# Altium PCB PCB1.PcbDoc (part 1 of 3)
Units mm, origin at the board's own origin, x right, y up, seen from the top; angles counter-clockwise.
Board outline 150.95 x 92.76 mm, 4 copper layers (Top Layer, GND, VCC, Bottom Layer); 250 components, 258 nets, 1099 pads, 538 vias.
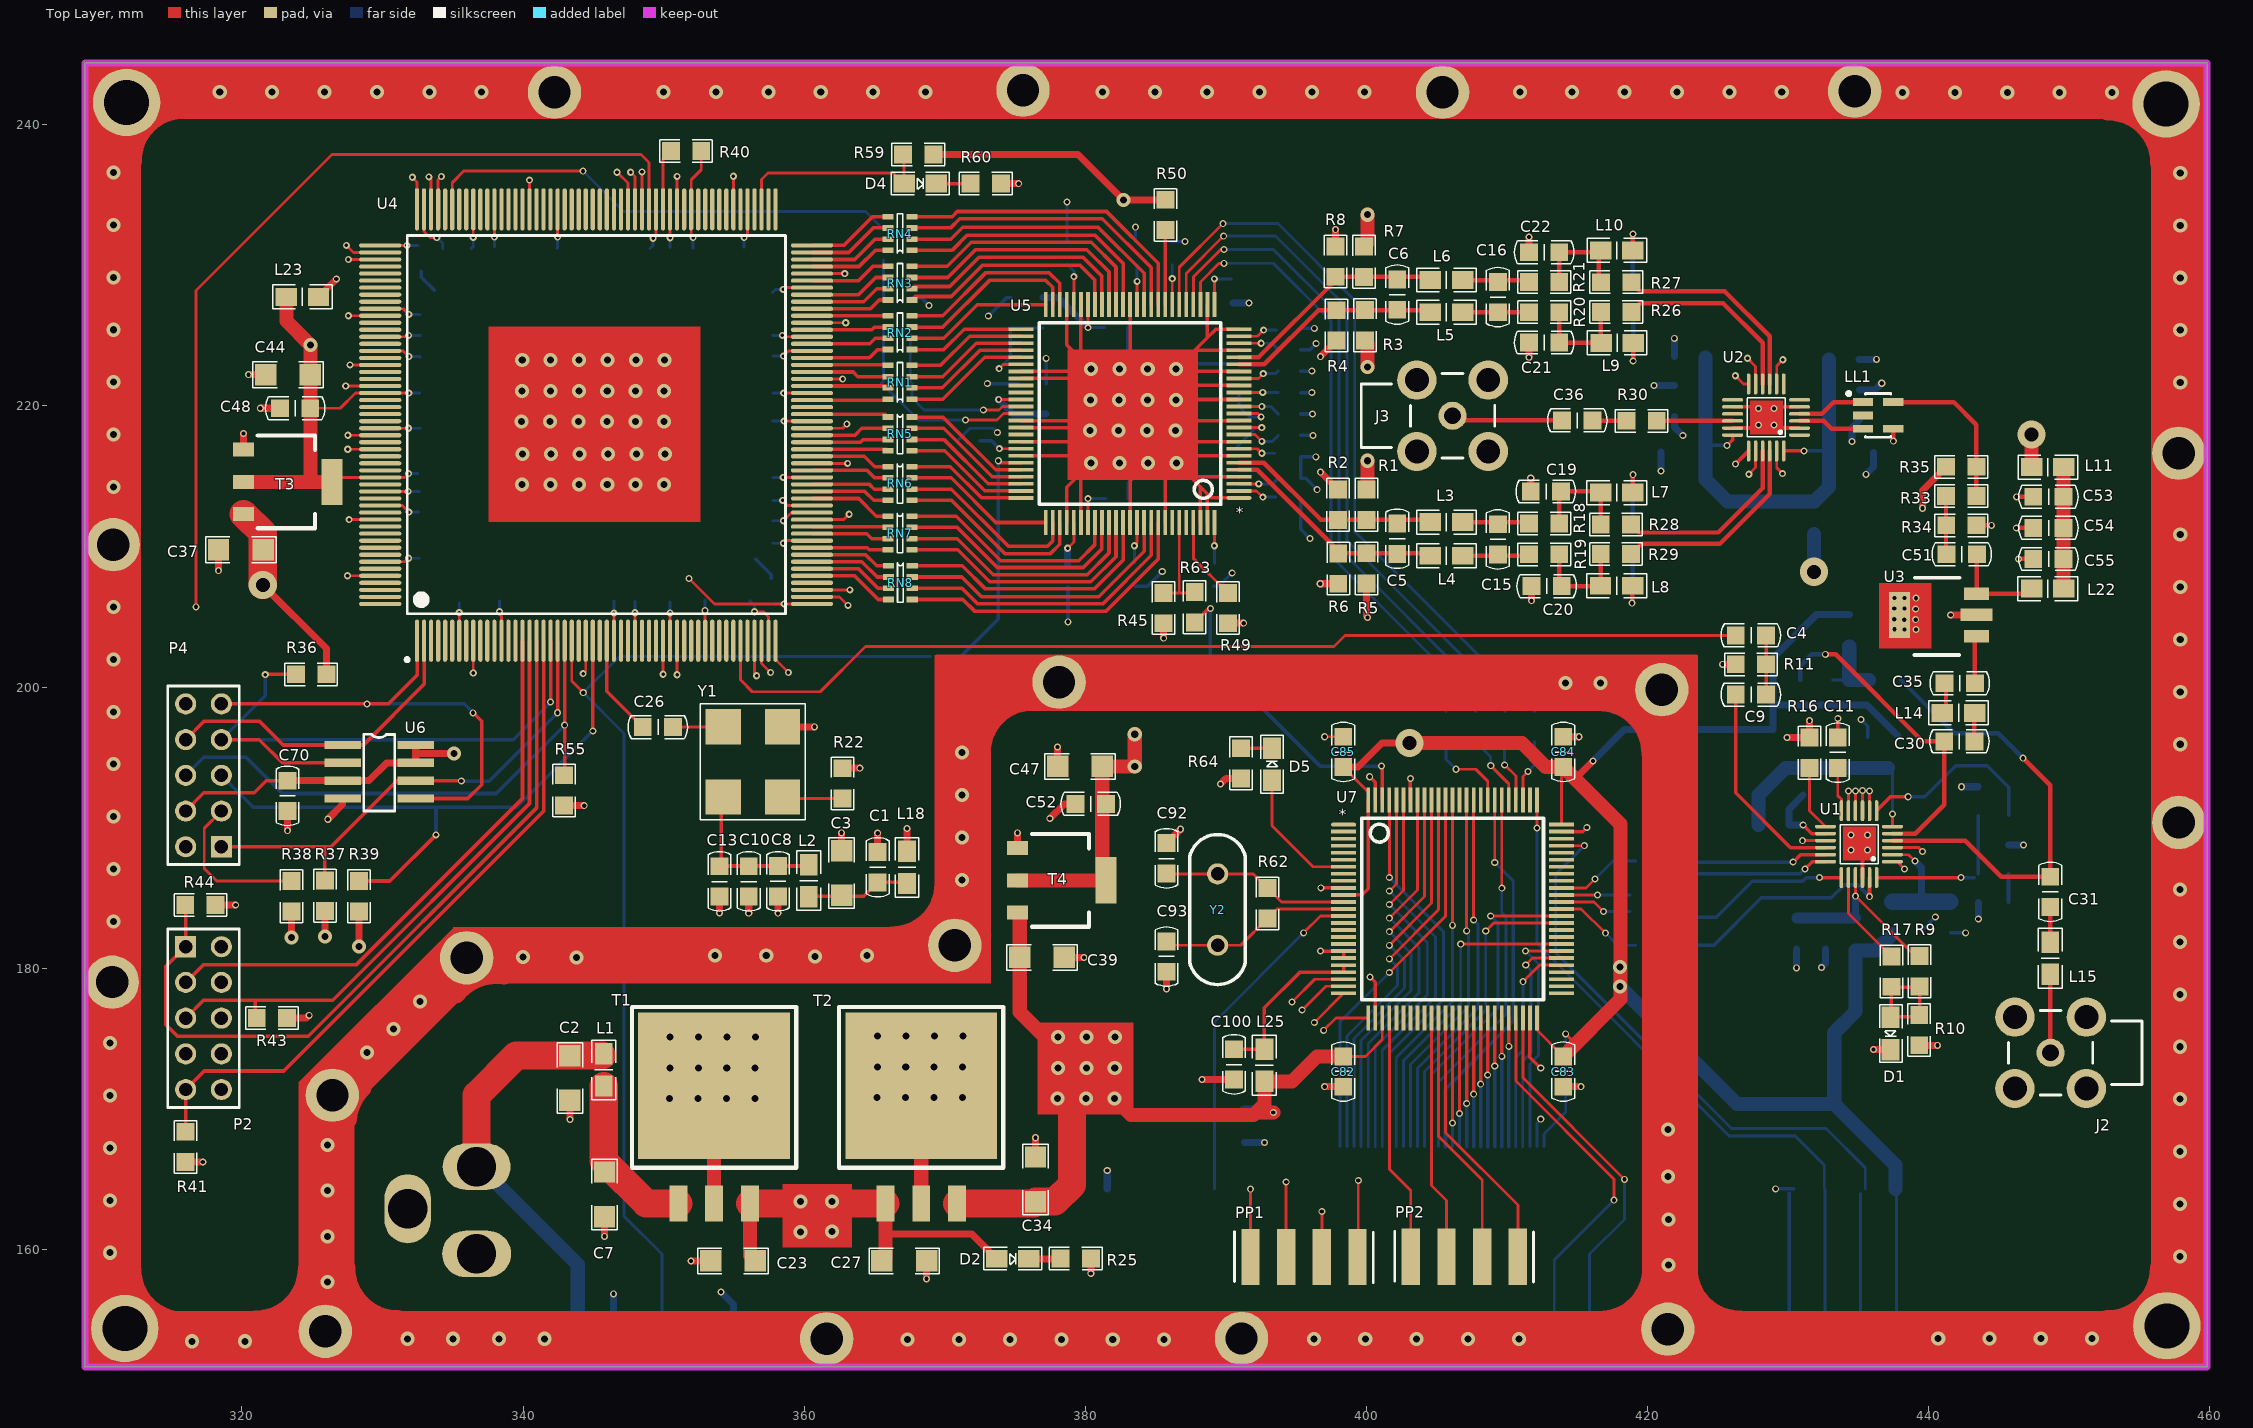
[diagram p0: Top Layer view]
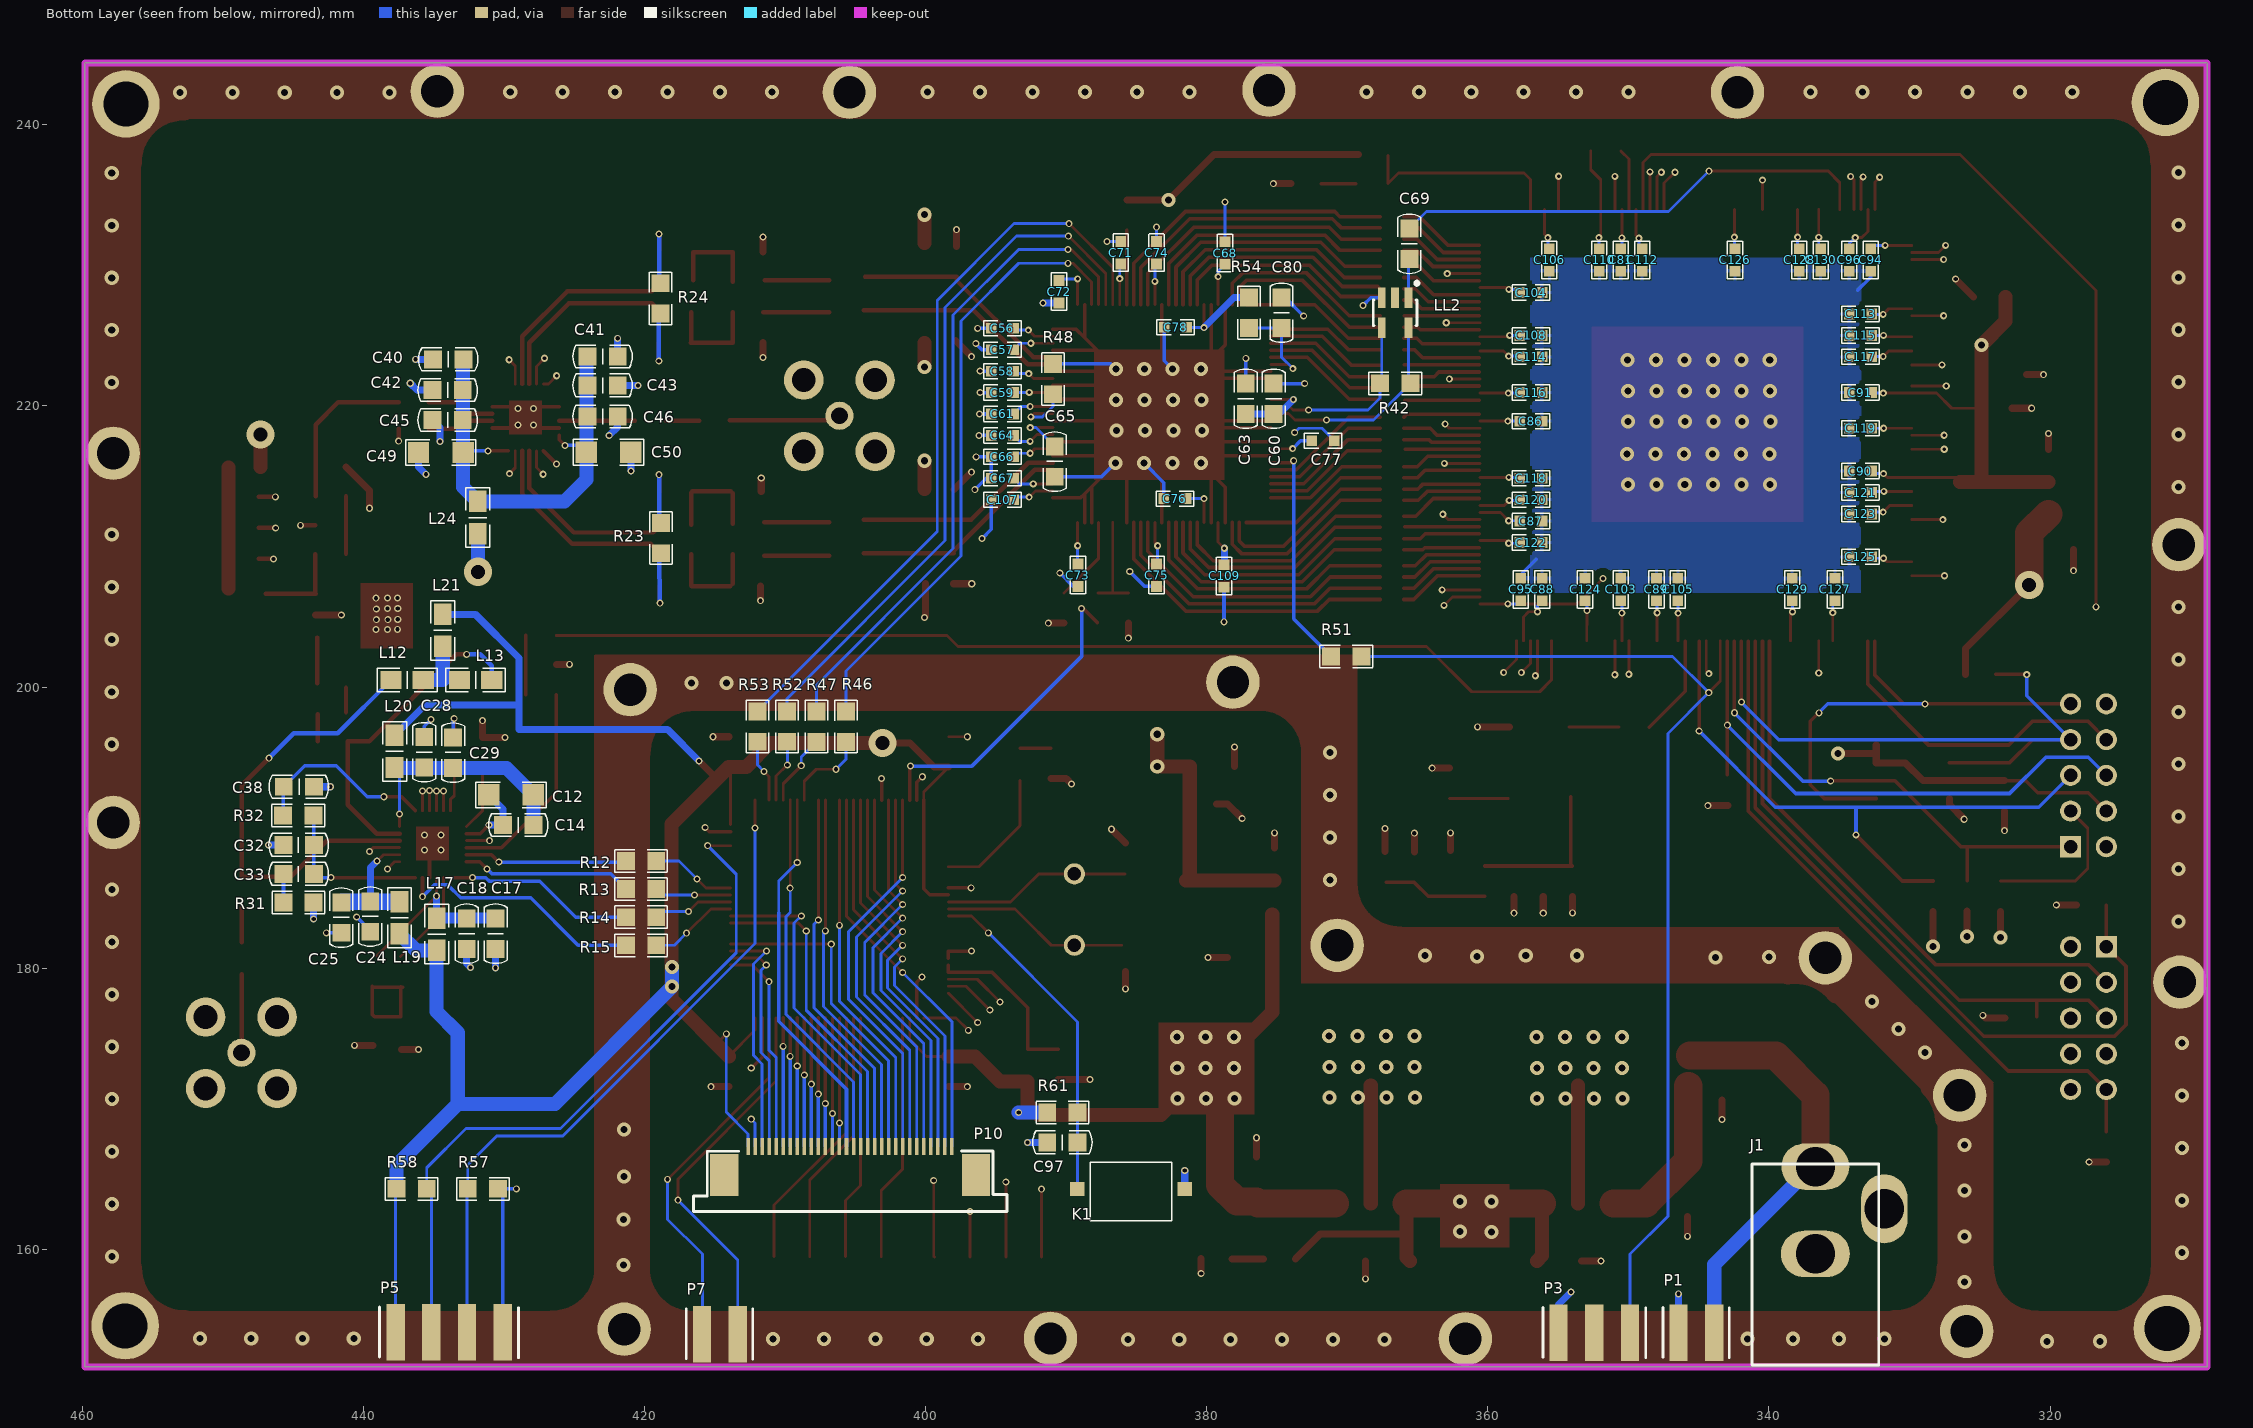
[diagram p1: Bottom Layer view, seen from below]
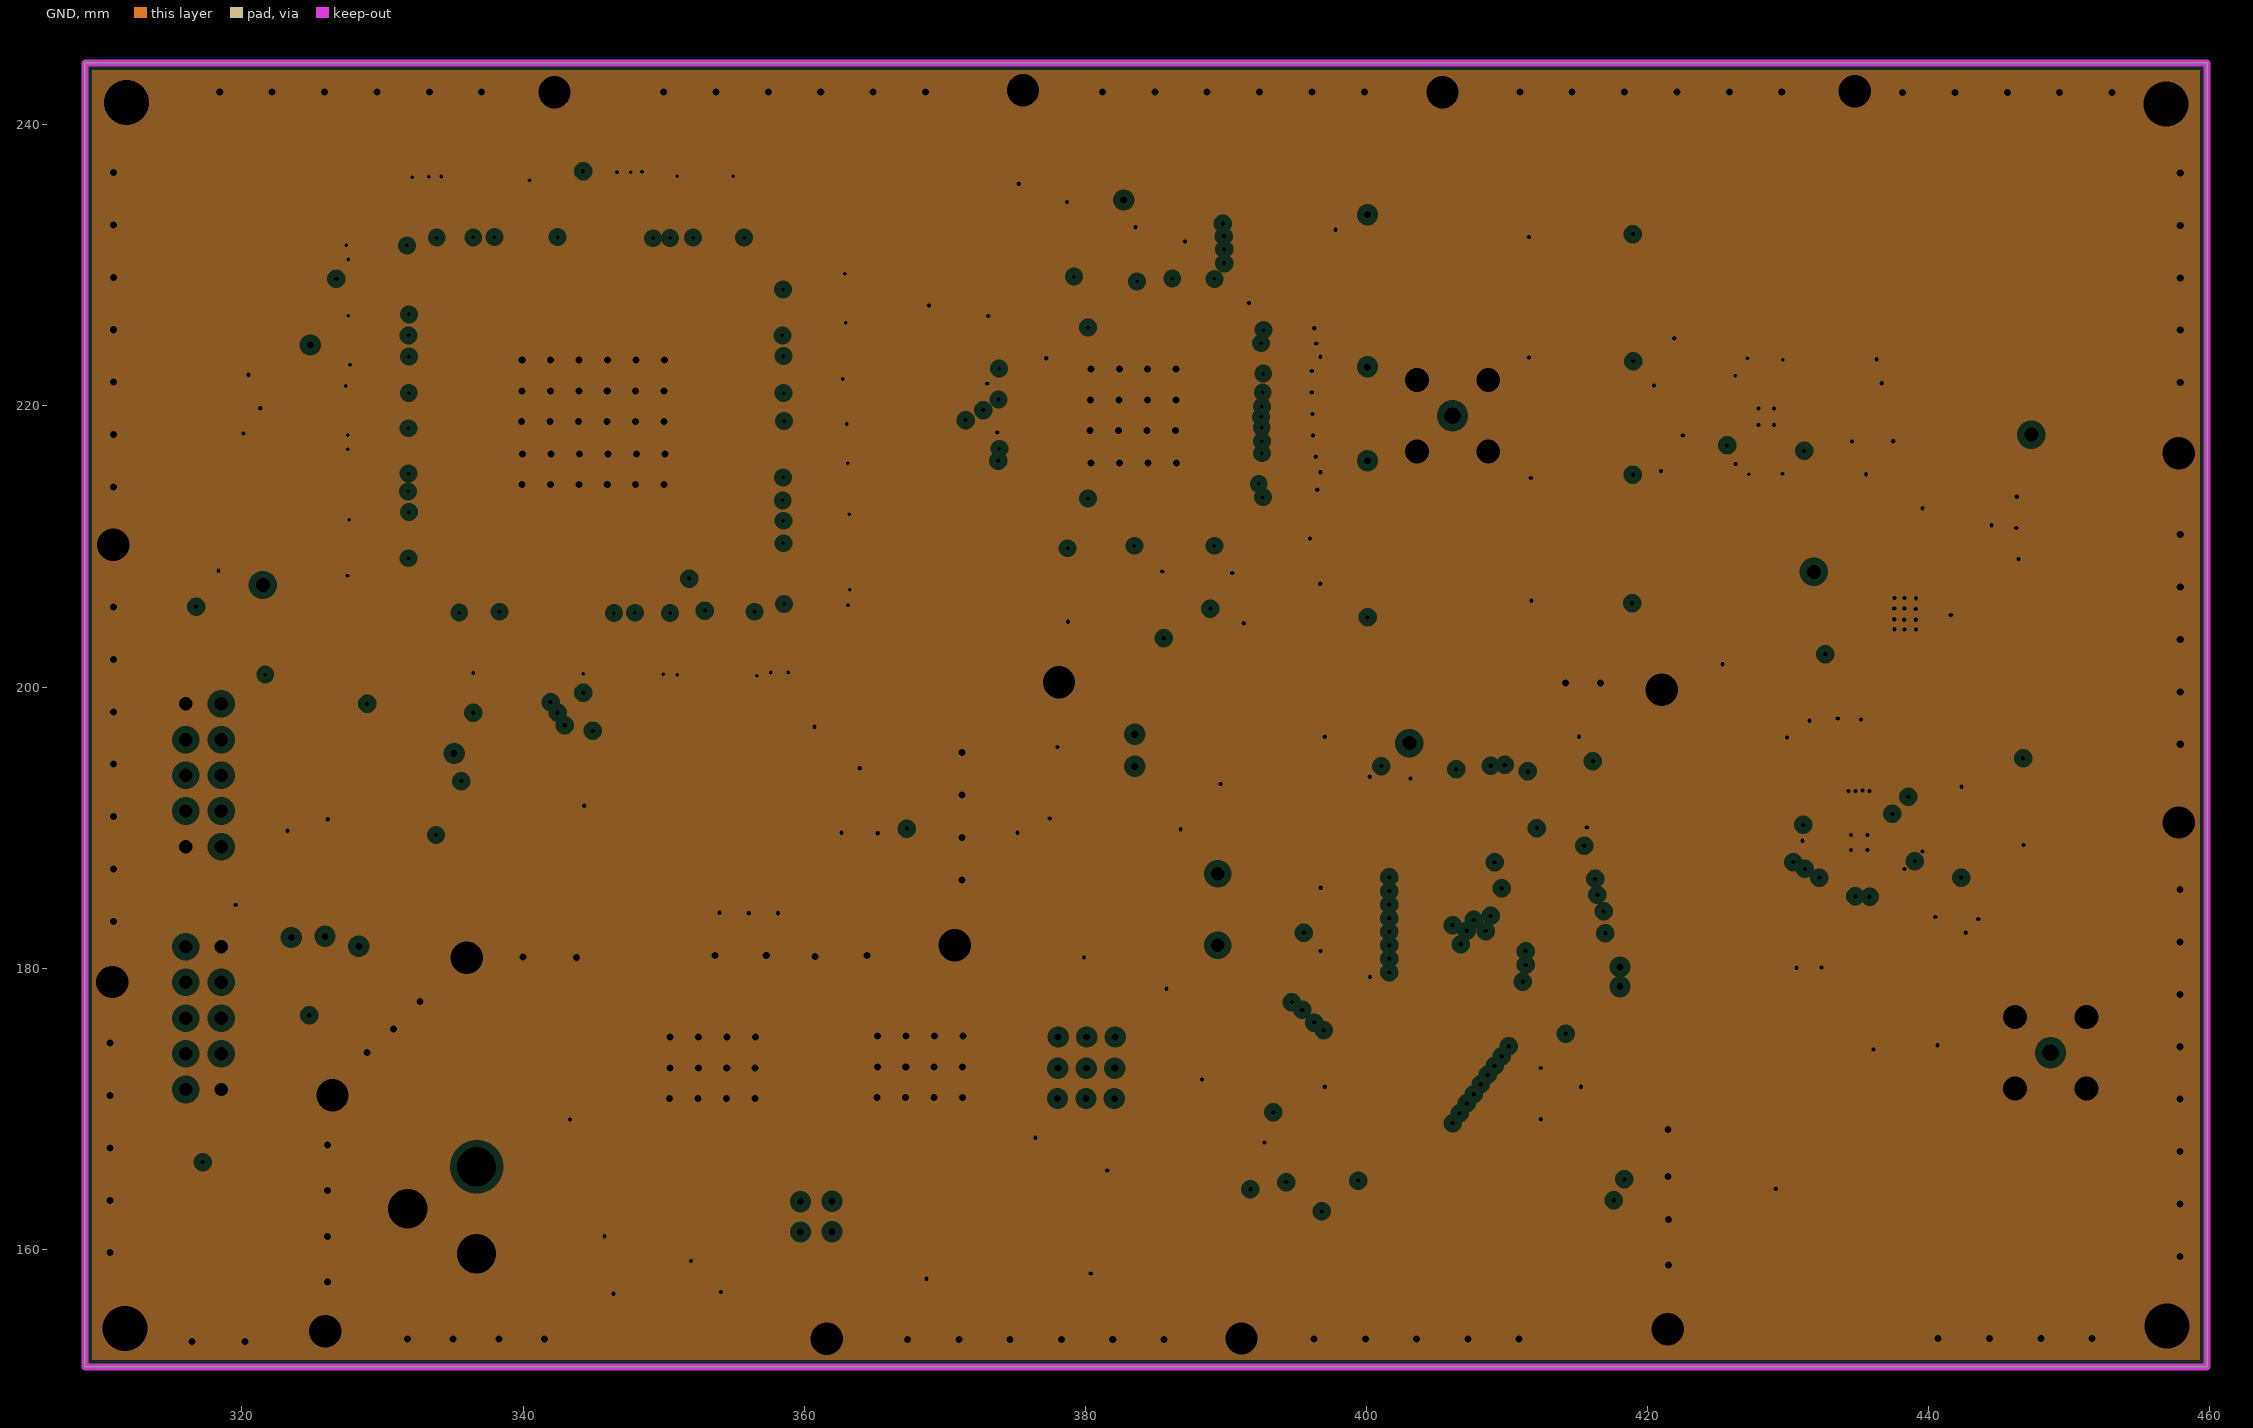
[diagram p2: GND, clearances drawn from the general rule]
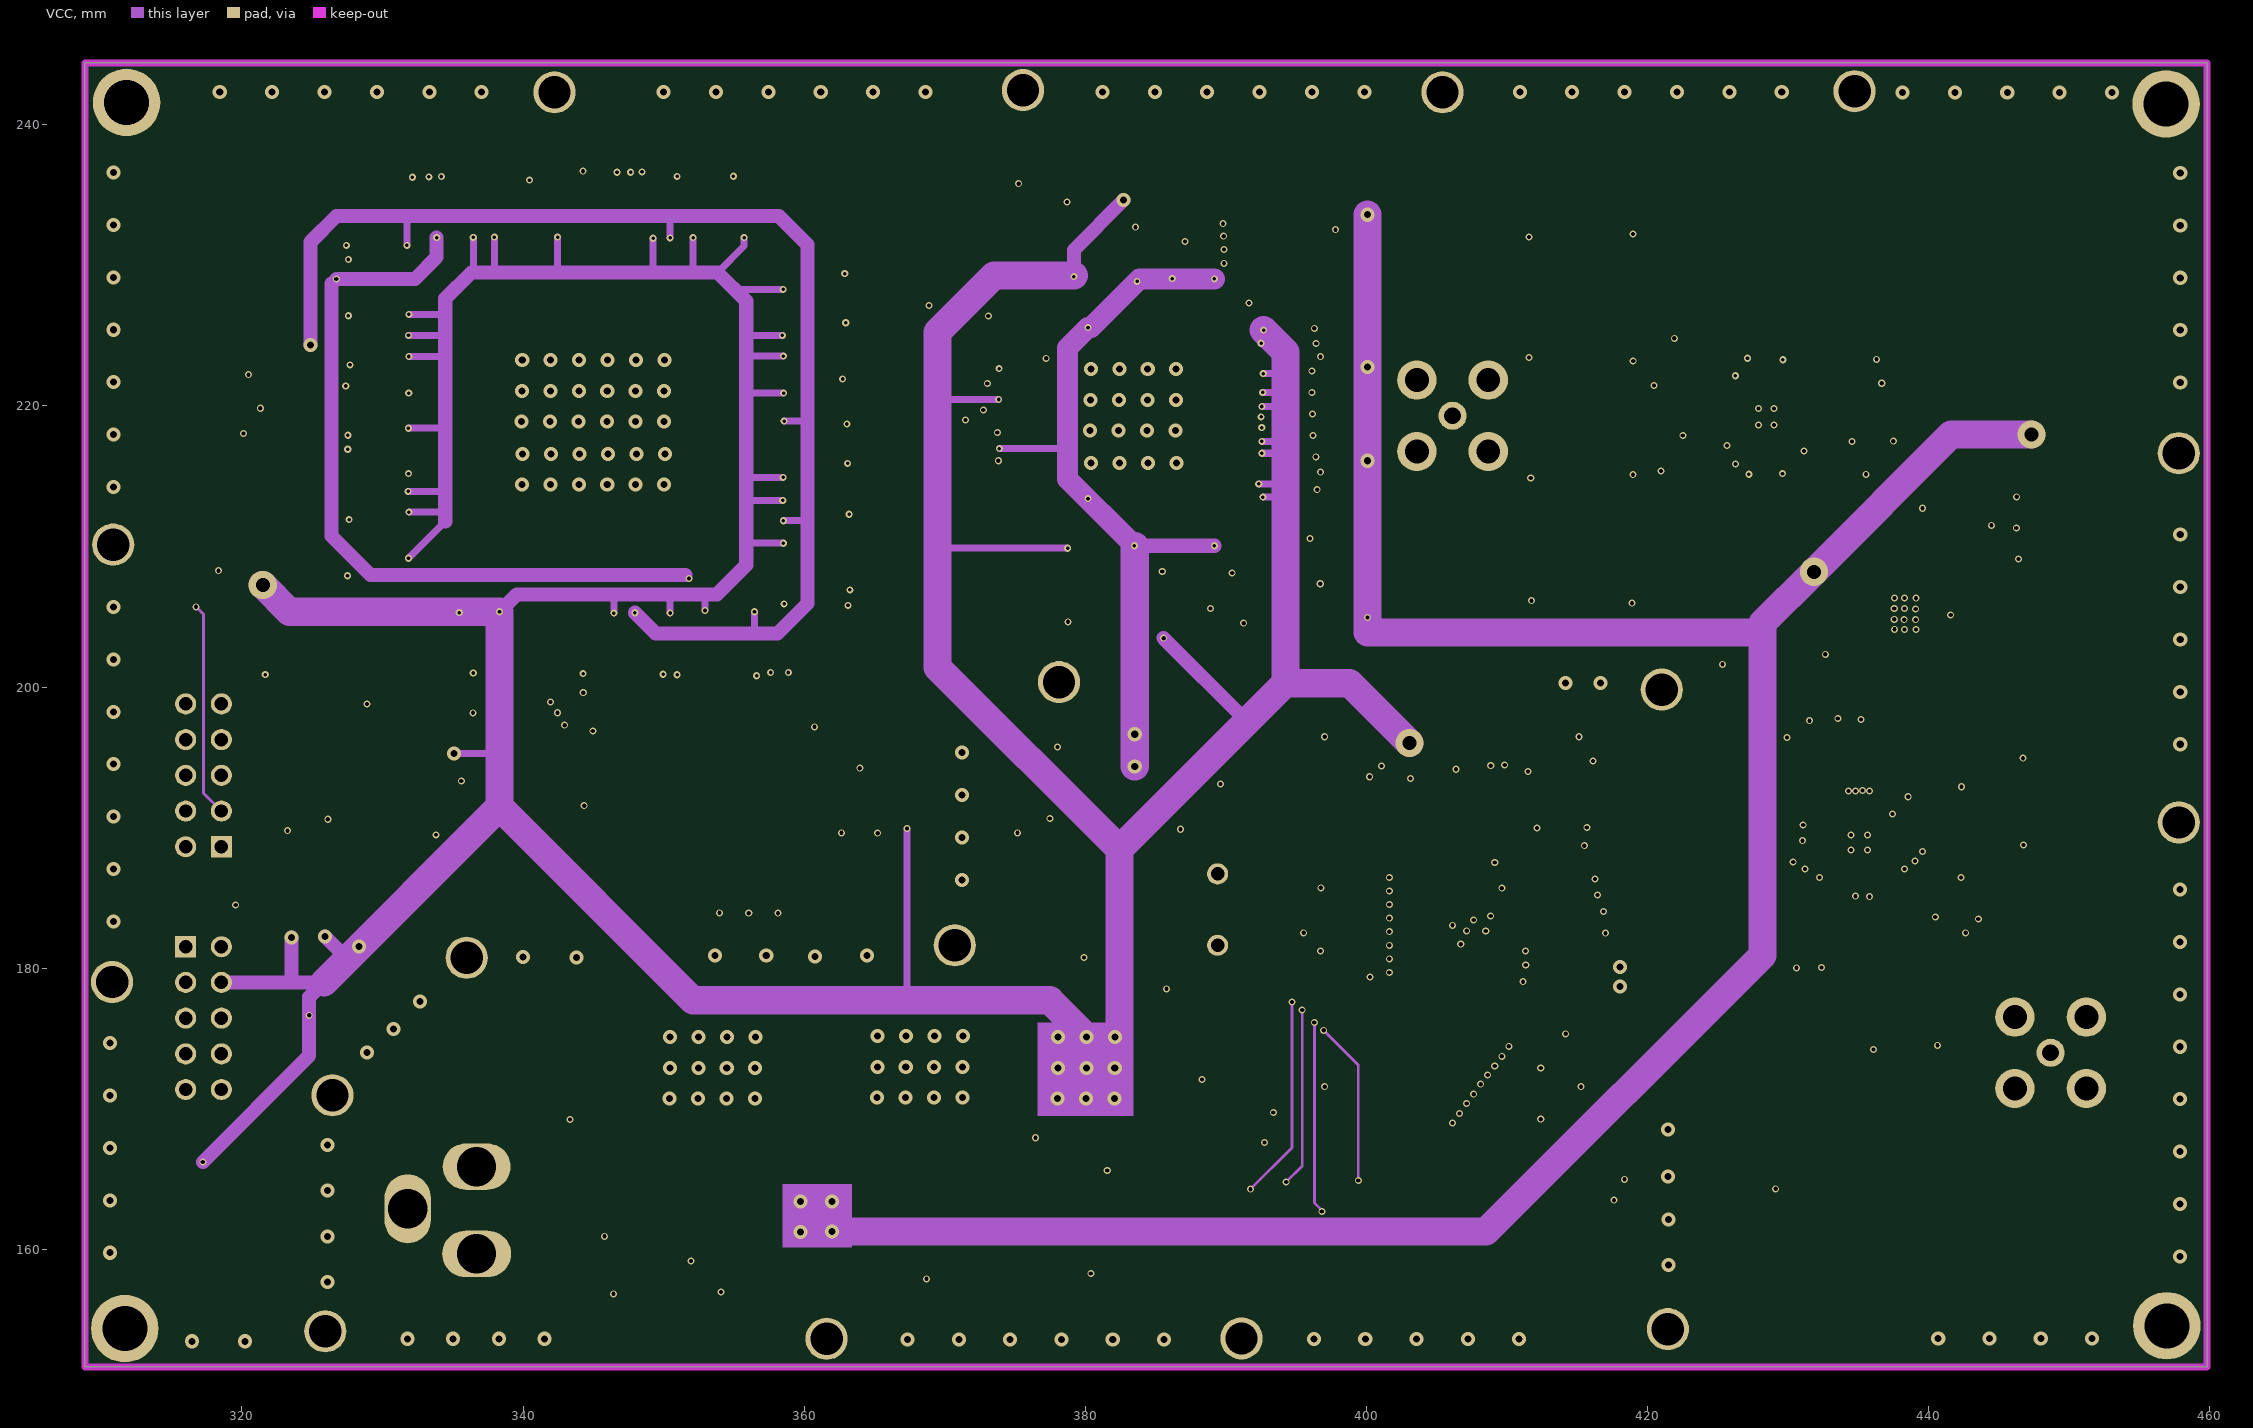
[diagram p3: VCC]

## Layer stack, top to bottom
Top Solder: solder mask 0.0102, Solder Resist, Dk 3.5
Top Layer: signal copper 0.0356
Dielectric1: core 0.32, FR-4, Dk 4.8
GND: plane copper 0.0356, net GND
Dielectric3: prepreg 0.32, FR-4, Dk 4.8
VCC: signal copper 0.0356
Dielectric2: core 0.32, FR-4, Dk 4.8
Bottom Layer: signal copper 0.0356
Bottom Solder: solder mask 0.0102, Solder Resist, Dk 3.5

## Board outline
308.839,151.638 459.791,151.638 459.791,244.399 308.839,244.399

## Design rules (kind name [scope] priority, off if disabled: settings)
Clearance [All] p1 off: gap=0
Clearance Clearance_1 [(InPolygon)] p2: gap=0.508
HoleSize [All] p1: absolutevalues=TRUE maxlimit=25.4 minlimit=0.025 maxpercent=80.000 minpercent=20.000
HoleToHoleClearance [All] p1: gap=0.025 allowstackedmicrovias=TRUE
MinimumSolderMaskSliver [All] p1: minsoldermaskwidth=0.003
PlaneClearance [All] p1: clearance=0.508
PlaneConnect [All] p1: planeconnectstyle=Relief reliefexpansion=0.508 reliefentries=4 reliefconductorwidth=0.254 reliefairgap=0.254
PolygonConnect PolygonConnect_1 [All] p1: connectstyle=Relief reliefconductorwidth=0.254 reliefentries=4 polygonreliefangle="90 Angle" airgapwidth=0.254
RoutingVias [All] p1: holewidth=0.711 width=1.27 viastyle="Through Hole" minholewidth=0.3 minwidth=0.3 maxholewidth=7 maxwidth=7
SilkToSilkClearance [All] p1: silktosilkclearance=0.025
SilkToSolderMaskClearance SilkscreenOverComponentPads [IsPad] p1: minsilkscreentomaskgap=0.003 clearancetoexposedcopper=TRUE
SolderMaskExpansion [All] p1: expansion=0.102
Width [All] p1: maxlimit=4 minlimit=0.127 preferedwidth=0.127
22 further rules are at their usual default settings.

## Classes and differential pairs
net class DB[15..0]: DB0 DB1 DB2 DB3 DB4 DB5 DB6 DB7 DB8 DB9 DB10 DB11 DB12 DB13 DB14 DB15
net class DA[15..0]: DA0 DA1 DA2 DA3 DA4 DA5 DA6 DA7 DA8 DA9 DA10 DA11 DA12 DA13 DA14 DA15

## Components (designator, comment, footprint, x,y, rotation, side; value= is the part's Value field where it differs from the comment)
C1 "Cap" 0805C 365.354,188.265 r270 top
C2 "10uF" 1206 343.332,173.914 r270 top
C3 "4.7uF" 1206 362.661,185.064 r90 top
C4 "Cap" 0805C 426.263,203.81 r0 top
C5 "Cap" 0805C 402.057,209.474 r90 top
C6 "Cap" 0805C 402.311,229.006 r270 top
C7 "10uF" 1206 345.796,165.633 r270 top
C8 "Cap" 0805C 358.013,185.115 r90 top
C9 "Cap" 0805C 426.263,199.593 r0 top
C10 "Cap" 0805C 356.184,187.261 r270 top
C11 "Cap" 0805C 433.4,194.259 r90 top
C12 "10uF" 1206 427.761,192.329 r0 bottom
C13 "Cap" 0805C 354.101,187.261 r270 top
C14 "Cap" 0805C 427.888,190.068 r0 bottom
C15 "Cap" 0805C 409.219,209.423 r90 top
C16 "Cap" 0805C 409.473,228.829 r270 top
C17 "Cap" 0805C 430.454,183.54 r270 bottom
C18 "Cap" 0805C 432.511,183.54 r270 bottom
C19 "Cap" 0805C 411.683,214.046 r0 top
C20 "Cap" 0805C 411.734,207.315 r0 top
C21 "Cap" 0805C 411.556,224.638 r0 top
C22 "Cap" 0805C 411.556,231.064 r0 top
C23 "10uF" 1206 356.641,159.182 r180 top
C24 "Cap" 0805C 439.623,182.601 r90 bottom
C25 "Cap" 0805C 441.681,182.524 r90 bottom
C26 "Cap" 0805C 348.513,197.282 r0 top
C27 "6.8uF" 1206 368.833,159.182 r180 top
C28 "Cap" 0805C 435.788,194.285 r90 bottom
C29 "Cap" 0805C 433.73,194.259 r90 bottom
C30 "Cap" 0805C 443.255,196.012 r180 top
C31 "Cap" 0805C 448.513,184.353 r90 top
C32 "Cap" 0805C 443.509,188.652 r0 bottom
C33 "Cap" 0805C 443.509,186.585 r0 bottom
C34 "10uF" 1206 376.453,163.271 r90 top
C35 "Cap" 0805C 441.122,200.406 r0 top
C36 "Cap" 0805C 416.077,218.846 r180 top
C37 "10uF" 1206 321.64,209.779 r180 top
C38 "Cap" 0805C 445.656,193.04 r180 bottom
C39 "10uF" 1206 375.209,180.772 r0 top
C40 "Cap" 0805C 435.026,223.444 r180 bottom
C41 "Cap" 0805C 424.053,223.647 r180 bottom
C42 "Cap" 0805C 435.077,221.259 r180 bottom
C43 "Cap" 0805C 424.053,221.59 r180 bottom
C44 "10uF" 1206 324.993,222.225 r180 top
C45 "Cap" 0805C 435.077,219.126 r180 bottom
C46 "Cap" 0805C 424.053,219.38 r180 bottom
C47 "10uF" 1206 381.33,194.361 r180 top
C48 "Cap" 0805C 322.707,219.964 r0 top
C49 "4.7uF" 1206 436.194,216.687 r180 bottom
C50 "4.7uF" 1206 424.256,216.713 r180 bottom
C51 "Cap" 0805C 441.261,209.575 r0 top
C52 "Cap" 0805C 379.298,191.821 r0 top
C53 "Cap" 0805C 447.434,213.665 r0 top
C54 "Cap" 0805C 447.434,211.455 r0 top
C55 "Cap" 0805C 447.434,209.245 r0 top
C56 "0.1uf" 0603 393.725,225.527 r0 bottom
C57 "0.01uF" 0603 393.725,224.003 r0 bottom
C58 "0.1uf" 0603 393.725,222.479 r0 bottom
C59 "0.01uF" 0603 393.725,220.955 r0 bottom
C60 "Cap" 0805C 375.107,221.59 r270 bottom
C61 "0.1uf" 0603 393.725,219.431 r0 bottom
C63 "Cap" 0805C 377.088,221.59 r270 bottom
C64 "0.01uF" 0603 393.725,217.907 r0 bottom
C65 "Cap" 0805C 390.931,214.962 r90 bottom
C66 "0.1uf" 0603 393.725,216.383 r0 bottom
C67 "0.01uF" 0603 393.725,214.859 r0 bottom
C68 "0.1uf" 0603 378.689,230.073 r90 bottom
C69 "Cap" 0805C 365.709,230.454 r90 bottom
C70 "Cap" 0805C 323.113,191.186 r90 top
C71 "0.1uf" 0603 386.105,230.099 r90 bottom
C72 "0.01uF" 0603 390.5,228.93 r270 bottom
C73 "0.1uf" 0603 389.153,208.763 r270 bottom
C74 "0.01uF" 0603 383.565,230.099 r90 bottom
C75 "0.1uf" 0603 383.565,208.763 r270 bottom
C76 "0.01uF" 0603 381.457,213.411 r0 bottom
C77 "0.1uf" 0603 372.516,217.526 r180 bottom
C78 "0.01uF" 0603 381.406,225.603 r0 bottom
C80 "Cap" 0805C 374.548,227.711 r270 bottom
C81 "Cap" 0603 350.545,229.591 r90 bottom
C82 "104" 0805C 398.221,171.577 r90 top
C83 "104" 0805C 413.868,171.577 r90 top
C84 "104" 0805C 414.122,196.469 r270 top
C85 "104" 0805C 398.475,196.469 r270 top
C86 "Cap" 0603 356.133,218.923 r0 bottom
C87 "Cap" 0603 356.133,211.811 r0 bottom
C88 "Cap" 0603 356.133,207.747 r270 bottom
C89 "Cap" 0603 348.005,207.747 r270 bottom
C90 "Cap" 0603 334.289,215.367 r180 bottom
C91 "Cap" 0603 334.289,220.955 r180 bottom
C92 "Cap" 0805C 385.902,188.9 r270 top
C93 "Cap" 0805C 385.648,179.756 r90 top
C94 "Cap" 0603 332.765,229.591 r90 bottom
C95 "Cap" 0603 357.657,207.747 r270 bottom
C96 "Cap" 0603 334.289,229.591 r90 bottom
C97 "Cap" 0805C 389.179,167.488 r0 bottom
C100 "Cap" 0805C 390.703,174.244 r270 top
C103 "Cap" 0603 350.545,207.747 r270 bottom
C104 "Cap" 0603 356.133,228.067 r0 bottom
C105 "Cap" 0603 346.481,207.747 r270 bottom
C106 "Cap" 0603 355.625,229.591 r90 bottom
C107 "Cap" 0603 395.326,213.335 r180 bottom
C108 "Cap" 0603 356.133,225.019 r0 bottom
C109 "Cap" 0603 378.765,207.112 r90 bottom
C110 "Cap" 0603 352.069,229.591 r90 bottom
C112 "Cap" 0603 349.021,229.591 r90 bottom
C113 "Cap" 0603 334.289,226.543 r180 bottom
C114 "Cap" 0603 356.133,223.495 r0 bottom
C115 "Cap" 0603 334.289,225.019 r180 bottom
C116 "Cap" 0603 356.133,220.955 r0 bottom
C117 "Cap" 0603 334.289,223.495 r180 bottom
C118 "Cap" 0603 356.133,214.859 r0 bottom
C119 "Cap" 0603 334.289,218.415 r180 bottom
C120 "Cap" 0603 356.133,213.335 r0 bottom
C121 "Cap" 0603 334.289,213.843 r180 bottom
C122 "Cap" 0603 356.133,210.287 r0 bottom
C123 "Cap" 0603 334.289,212.319 r180 bottom
C124 "Cap" 0603 353.085,207.747 r270 bottom
C125 "Cap" 0603 334.289,209.271 r180 bottom
C126 "Cap" 0603 342.417,229.591 r90 bottom
C127 "Cap" 0603 335.305,207.747 r270 bottom
C128 "Cap" 0603 337.845,229.591 r90 bottom
C129 "Cap" 0603 338.353,207.747 r270 bottom
C130 "Cap" 0603 336.321,229.591 r90 bottom
D1 "LED1" 0805D 437.286,176.505 r270 top
D2 "LED1" 0805D 373.685,159.334 r0 top
D4 "LED0" 0805D 367.106,235.814 r0 top
D5 "LED1" 0805D 393.268,193.37 r90 top
J1 "PWR2.5" DS-3 337.363,155.626 r90 bottom
J2 "COAX-F" MCX5.08-H5 448.666,173.99 r180 top
J3 "COAX-F" MCX5.08-H5 406.121,219.304 r0 top
K1 "BUTTON" k1 381.559,164.287 r0 bottom
L1 "Inductor Iron" 0805L 345.872,173.914 r270 top
L2 "4.7uH" 0805L 360.197,185.09 r90 top
L3 "0" 0805L 404.546,211.861 r0 top
L4 "0" 0805L 404.546,209.474 r0 top
L5 "0" 0805L 404.546,226.797 r0 top
L6 "0" 0805L 404.546,229.083 r0 top
L7 "33nH" 0805L 418.948,213.716 r180 top
L8 "33nH" 0805L 416.648,207.34 r0 top
L9 "33nH" 0805L 418.973,224.358 r180 top
L10 "33nH" 0805L 416.662,231.191 r0 top
L11 "Inductor Iron" 0805L 447.319,215.773 r0 top
L12 "47nH" 0805L 438.023,200.635 r180 bottom
L13 "47nH" 0805L 430.86,200.381 r0 bottom
L14 "33nH" 0805L 443.255,198.044 r180 top
L15 "33nH" 0805L 448.767,181.864 r270 top
L17 "Inductor Iron" 0805L 434.899,181.28 r90 bottom
L18 "Inductor Iron" 0805L 367.436,188.316 r270 top
L19 "Inductor Iron" 0805L 437.54,182.448 r90 bottom
L20 "Inductor Iron" 0805L 437.642,196.571 r270 bottom
L21 "Inductor Iron" 0805L 434.213,205.181 r270 bottom
L22 "82nH" 0805L 449.605,206.883 r180 top
L23 "Inductor Iron" 0805L 323.164,227.889 r0 top
L24 "Inductor Iron" 0805L 431.724,213.208 r270 bottom
L25 "Inductor" 0805L 392.608,171.958 r90 top
LL1 "Trans CT" SOT23-5 437.413,219.964 r270 top
LL2 "Trans CT" SOT23-5 365.963,225.614 r0 bottom
P1 "Header 2" SIP2-T0 346.431,154.076 r180 bottom
P2 "Header 5X2" IDC5 316.001,181.534 r270 top
P3 "Header 3" SIP3-T0 354.965,154.076 r180 bottom
P4 "Header 5X2" IDC5 318.541,188.646 r90 top
P5 "Header 4" SIP4-T0 430.073,154.102 r0 bottom
P7 "Header 2" SIP2-T0 415.9,153.975 r180 bottom
P10 "Header 30" FFC_30P_0.5MM 405.613,165.151 r0 bottom
PP1 "Header 4" SIP4-T0 399.364,159.461 r180 top
PP2 "Header 4" SIP4-T0 410.769,159.487 r180 top
R1 "115" 0805 400.012,213.919 r270 top
R2 "634" 0805 397.967,212.026 r90 top
R3 "115" 0805 399.885,224.79 r90 top
R4 "634" 0805 397.866,226.682 r270 top
R5 "115" 0805 400.012,207.493 r90 top
R6 "634" 0805 397.993,209.385 r270 top
R7 "115" 0805 399.834,231.216 r270 top
R8 "634" 0805 397.789,229.324 r90 top
R9 "10K" 0805 439.344,178.841 r90 top
R10 "10K" 0805 439.318,176.555 r270 top
R11 "51" 0805 428.295,201.625 r180 top
R12 "22" 0805 421.183,187.63 r180 bottom
R13 "22" 0805 421.183,185.632 r180 bottom
R14 "22" 0805 421.183,183.634 r180 bottom
R15 "22" 0805 421.183,181.635 r180 bottom
R16 "4.7K" 0805 431.521,194.386 r90 top
R17 "10K" 0805 437.337,180.721 r270 top
R18 "60.4" 0805 413.588,211.633 r180 top
R19 "60.4" 0805 413.588,209.448 r180 top
R20 "60.4" 0805 413.588,226.67 r180 top
R21 "60.4" 0805 413.588,228.829 r180 top
R22 "12" 0805 362.737,192.202 r90 top
R23 "90.9" 0805 418.821,211.557 r270 bottom
R24 "90.9" 0805 418.846,226.695 r90 bottom
R25 "51K" 0805 380.263,159.36 r180 top
R26 "0" 0805 418.719,226.695 r180 top
R27 "0" 0805 418.719,228.803 r180 top
R28 "0" 0805 418.694,211.557 r180 top
R29 "0" 0805 418.694,209.474 r180 top
R30 "0" 0805 418.617,218.948 r0 top
R31 "2.5K" 0805 445.554,184.683 r180 bottom
R32 "4.3K" 0805 443.662,190.871 r0 bottom
R33 "0" 0805 443.255,213.584 r180 top
R34 "0" 0805 441.363,211.51 r0 top
R35 "0" 0805 443.255,215.671 r180 top
R36 "10K" 0805 323.977,200.914 r0 top
R37 "10K" 0805 325.907,186.106 r270 top
R38 "10K" 0805 323.52,186.08 r270 top
R39 "10K" 0805 328.32,186.08 r270 top
R40 "10K" 0805 350.647,238.125 r0 top
R41 "10K" 0805 316.001,166.345 r90 top
R42 "120" 0805 367.538,221.615 r180 bottom
R43 "10K" 0805 321.183,176.454 r0 top
R44 "10K" 0805 318.008,184.506 r180 top
R45 "1K" 0805 385.572,206.578 r270 top
R46 "22" 0805 405.663,198.14 r270 bottom
R47 "22" 0805 407.763,198.14 r270 bottom
R48 "1K" 0805 390.931,220.962 r90 bottom
R49 "22" 0805 390.144,206.578 r270 top
R50 "22" 0805 385.699,232.639 r90 top
R51 "22" 0805 369.113,202.184 r0 bottom
R52 "22" 0805 409.863,196.24 r90 bottom
R53 "22" 0805 411.963,196.24 r90 bottom
R54 "10" 0805 376.987,227.584 r270 bottom
R55 "10K" 0805 342.925,191.694 r90 top
R57 "10K" 0805 432.435,164.313 r180 bottom
R58 "10K" 0805 437.515,164.313 r180 bottom
R59 "10K" 0805 367.157,237.896 r0 top
R60 "200" 0805 373.863,235.814 r180 top
R61 "10K" 0805 389.306,169.748 r0 bottom
R62 "1M" 0805 392.963,183.667 r90 top
R63 "22" 0805 387.782,204.724 r90 top
R64 "1K" 0805 391.084,195.529 r270 top
RN1 "RES*4" 0603*4反 367.663,220.488 r180 top
RN2 "RES*4" 0603*4反 367.663,224.014 r180 top
RN3 "RES*4" 0603*4反 367.663,227.539 r180 top
RN4 "RES*4" 0603*4反 367.663,231.064 r180 top
RN5 "RES*4" 0603*4反 365.963,219.211 r0 top
RN6 "RES*4" 0603*4反 365.963,215.686 r0 top
RN7 "RES*4" 0603*4反 365.963,212.161 r0 top
RN8 "RES*4" 0603*4反 365.989,208.636 r0 top
T1 "SPX293300T_5.0" TO-263 351.053,163.271 r0 top
T2 "SPX29300T_3.3" TO-263 365.785,163.271 r0 top
T3 "ASM1117_1_2" SOT-223 320.116,216.891 r270 top
T4 "1117_1_8" SOT-223 375.183,188.544 r270 top
U1 "ADF4360" QFN24 437.413,187.579 r180 top
U2 "TRF370333" QFN24 430.809,217.932 r180 top
U3 "SBB_5089" SBB_5089 443.382,203.632 r90 top
U4 "EP2C8Q208C8" FPGA208 345.211,218.669 r90 top
U5 "DAC5687-X" TQFP100 388.391,211.557 r180 top
U6 "EPCS4SI8N" SOP8 327.177,195.758 r0 top
U7 "STM32F101V8T6" TQFP100 400.914,192.126 r0 top
Y1 "TCXO" 晶振7050 358.445,192.176 r90 top
Y2 "8M" 晶振-1 389.407,181.635 r90 top

## Footprints (in the part's own frame and the unit in brackets; to place one, negate y for a bottom-side part, rotate by r counter-clockwise, add the part's x,y. Pads: shape width x height; smd on the part's side, far side on the other; paste and mask are expansions set on the pad)
0603 [mil]
  rect 30x30 smd: 1(0,0) 2(63,0)
  silkscreen extent -21,-21 84,21
0603*4反 [mm]
  rect 0.8x0.4 smd: 1(1.7,0) 2(1.7,-0.8) 3(1.7,-1.6) 4(1.7,-2.4) 5(0,-2.4) 6(0,-1.6) 7(0,-0.8) 8(0,0)
  silkscreen extent 0.65,-2.6 1.05,0.2
0805 [mil]
  rect 50x50 smd: 1(-5,0) 2(80,0)
  silkscreen extent -36,-31 111,31
0805C [mil]
  rect 50x50 smd: 1(0,-5) 2(85,-5)
  silkscreen extent -41,-37 126,27
0805D [mil]
  rect 60x50 smd: 1(0,0) 2(90,0)
  silkscreen extent -36,-31 126,32
0805L [mil]
  rect 60x50 smd: 1(0,-5) 2(90,-5)
  silkscreen extent -38,-38 129,29
1206 [mil]
  rect 60x60 smd: 1(5,0) 2(130,0)
  silkscreen extent -31,-36 166,36
DS-3 [mil]
  oval 130x190 hole 110: 1(403.98,-26.22)
  oval 192.91x130 hole 110: 2(285.87,-219.13)
  oval 130x192.91 hole 110: 3(159.88,-26.22)
  silkscreen extent -151,-203 412,151
FFC_30P_0.5MM [mm]
  rect 2x3 smd: 0(-9.193,-0.153) 0(8.707,-0.153)
  rect 0.25x1.2 smd: 1(-7.493,-2.159) 2(-6.993,-2.159) 3(-6.493,-2.159) 4(-5.993,-2.159) 5(-5.493,-2.159) 6(-4.993,-2.159) 7(-4.493,-2.159) 8(-3.993,-2.159) 9(-3.493,-2.159) 10(-2.993,-2.159) 11(-2.493,-2.159) 12(-1.993,-2.159) 13(-1.493,-2.159) 14(-0.993,-2.159) 15(-0.493,-2.159) 16(0.007,-2.159) 17(0.507,-2.159) 18(1.007,-2.159) 19(1.507,-2.159) 20(2.007,-2.159) 21(2.507,-2.159) 22(3.007,-2.159) 23(3.507,-2.159) 24(4.007,-2.159) 25(4.507,-2.159) 26(5.007,-2.159) 27(5.507,-2.16) 28(6.007,-2.16) 29(6.507,-2.16) 30(7.007,-2.16)
  silkscreen extent -11.41,-1.85 10.9,2.44
FPGA208 [mm] "Shrink QFP, 208-Leads, Body 28x28mm, Pitch 0.5mm, IPC Low Density"
  oval 3x0.3 smd: 1(-15.367,12.751) 2(-15.367,12.25) 3(-15.367,11.75) 4(-15.367,11.25) 5(-15.367,10.75) 6(-15.367,10.25) 7(-15.367,9.75) 8(-15.367,9.25) 9(-15.367,8.75) 10(-15.367,8.25) 11(-15.367,7.75) 12(-15.367,7.25) 13(-15.367,6.75) 14(-15.367,6.25) 15(-15.367,5.75) 16(-15.367,5.25) 17(-15.367,4.75) 18(-15.367,4.25) 19(-15.367,3.75) 20(-15.367,3.25) 21(-15.367,2.75) 22(-15.367,2.25) 23(-15.367,1.75) 24(-15.367,1.25) 25(-15.367,0.75) 26(-15.367,0.25) 27(-15.367,-0.25) 28(-15.367,-0.75) 29(-15.367,-1.25) 30(-15.367,-1.75) 31(-15.367,-2.25) 32(-15.367,-2.75) 33(-15.367,-3.25) 34(-15.367,-3.75) 35(-15.367,-4.25) 36(-15.367,-4.75) 37(-15.367,-5.25) 38(-15.367,-5.75) 39(-15.367,-6.25) 40(-15.367,-6.75) 41(-15.367,-7.25) 42(-15.367,-7.75) 43(-15.367,-8.25) 44(-15.367,-8.75) 45(-15.367,-9.25) 46(-15.367,-9.75) 47(-15.367,-10.25) 48(-15.367,-10.75) 49(-15.367,-11.25) 50(-15.367,-11.75) 51(-15.367,-12.25) 52(-15.367,-12.75) 105(15.316,-12.751) 106(15.316,-12.25) 107(15.316,-11.75) 108(15.316,-11.25) 109(15.316,-10.75) 110(15.316,-10.25) 111(15.316,-9.75) 112(15.316,-9.25) 113(15.316,-8.75) 114(15.316,-8.25) 115(15.316,-7.75) 116(15.316,-7.25) 117(15.316,-6.75) 118(15.316,-6.25) 119(15.316,-5.75) 120(15.316,-5.25) 121(15.316,-4.75) 122(15.316,-4.25) 123(15.316,-3.75) 124(15.316,-3.25) 125(15.316,-2.75) 126(15.316,-2.25) 127(15.316,-1.75) 128(15.316,-1.25) 129(15.316,-0.75) 130(15.316,-0.25) 131(15.316,0.25) 132(15.316,0.75) 133(15.316,1.25) 134(15.316,1.75) 135(15.316,2.25) 136(15.316,2.75) 137(15.316,3.25) 138(15.316,3.75) 139(15.316,4.25) 140(15.316,4.75) 141(15.316,5.25) 142(15.316,5.75) 143(15.316,6.25) 144(15.316,6.75) 145(15.316,7.25) 146(15.316,7.75) 147(15.316,8.25) 148(15.316,8.75) 149(15.316,9.25) 150(15.316,9.75) 151(15.316,10.25) 152(15.316,10.75) 153(15.316,11.25) 154(15.316,11.75) 155(15.316,12.25) 156(15.316,12.75)
  oval 0.3x3 smd: 53(-12.751,-15.342) 54(-12.25,-15.342) 55(-11.75,-15.342) 56(-11.25,-15.342) 57(-10.75,-15.342) 58(-10.25,-15.342) 59(-9.75,-15.342) 60(-9.25,-15.342) 61(-8.75,-15.342) 62(-8.25,-15.342) 63(-7.75,-15.342) 64(-7.25,-15.342) 65(-6.75,-15.342) 66(-6.25,-15.342) 67(-5.75,-15.342) 68(-5.25,-15.342) 69(-4.75,-15.342) 70(-4.25,-15.342) 71(-3.75,-15.342) 72(-3.25,-15.342) 73(-2.75,-15.342) 74(-2.25,-15.342) 75(-1.75,-15.342) 76(-1.25,-15.342) 77(-0.75,-15.342) 78(-0.25,-15.342) 79(0.25,-15.342) 80(0.75,-15.342) 81(1.25,-15.342) 82(1.75,-15.342) 83(2.25,-15.342) 84(2.75,-15.342) 85(3.25,-15.342) 86(3.75,-15.342) 87(4.25,-15.342) 88(4.75,-15.342) 89(5.25,-15.342) 90(5.75,-15.342) 91(6.25,-15.342) 92(6.75,-15.342) 93(7.25,-15.342) 94(7.75,-15.342) 95(8.25,-15.342) 96(8.75,-15.342) 97(9.25,-15.342) 98(9.75,-15.342) 99(10.25,-15.342) 100(10.75,-15.342) 101(11.25,-15.342) 102(11.75,-15.342) 103(12.25,-15.342) 104(12.75,-15.342) 157(12.75,15.367) 158(12.25,15.367) 159(11.75,15.367) 160(11.25,15.367) 161(10.75,15.367) 162(10.25,15.367) 163(9.75,15.367) 164(9.25,15.367) 165(8.75,15.367) 166(8.25,15.367) 167(7.75,15.367) 168(7.25,15.367) 169(6.75,15.367) 170(6.25,15.367) 171(5.75,15.367) 172(5.25,15.367) 173(4.75,15.367) 174(4.25,15.367) 175(3.75,15.367) 176(3.25,15.367) 177(2.75,15.367) 178(2.25,15.367) 179(1.75,15.367) 180(1.25,15.367) 181(0.75,15.367) 182(0.25,15.367) 183(-0.25,15.367) 184(-0.75,15.367) 185(-1.25,15.367) 186(-1.75,15.367) 187(-2.25,15.367) 188(-2.75,15.367) 189(-3.25,15.367) 190(-3.75,15.367) 191(-4.25,15.367) 192(-4.75,15.367) 193(-5.25,15.367) 194(-5.75,15.367) 195(-6.25,15.367) 196(-6.75,15.367) 197(-7.25,15.367) 198(-7.75,15.367) 199(-8.25,15.367) 200(-8.75,15.367) 201(-9.25,15.367) 202(-9.75,15.367) 203(-10.25,15.367) 204(-10.75,15.367) 205(-11.25,15.367) 206(-11.75,15.367) 207(-12.25,15.367) 208(-12.751,15.367)
  silkscreen extent -16.84,-13.45 13.45,13.57, body extent -14,-14 14,14, height 4.1
IDC5 [mm]
  rect 1.5x1.5 hole 0.95: 1(0,0)
  round 1.5 hole 0.95: 2(0,2.54) 3(2.54,0) 4(2.54,2.54) 5(5.08,0) 6(5.08,2.54) 7(7.62,0) 8(7.62,2.54) 9(10.16,0) 10(10.16,2.54)
  silkscreen extent -1.27,-1.27 11.43,3.81
k1 [mm]
  rect 1x1 smd: 1(0,0) 2(7.645,0)
  silkscreen extent 0.91,-1.91 6.71,2.26
MCX5.08-H5 [mm] "Connector; RF Coaxial, MCX, Thru-Hole; 5 Position; Right-Angle"
  round 2 hole 1.2: 1(0,0)
  round 2.8 hole 1.7: 2(-2.54,-2.54) 3(2.54,-2.54) 4(2.54,2.54) 5(-2.54,2.54)
  silkscreen extent -6.5,-3 3,3
QFN24 [mm]
  rrect100% 1.5x0.25 smd: 1(0,0) 2(0,-0.5) 3(0,-1) 4(0,-1.5) 5(0,-2) 6(0,-2.5) 13(4.762,-2.5) 14(4.762,-2) 15(4.762,-1.5) 16(4.762,-1) 17(4.762,-0.5) 18(4.762,0)
  rrect100% 0.25x1.5 smd: 7(1.131,-3.631) 8(1.631,-3.631) 9(2.131,-3.631) 10(2.631,-3.631) 11(3.131,-3.631) 12(3.631,-3.631) 19(3.631,1.131) 20(3.131,1.131) 21(2.631,1.131) 22(2.131,1.131) 23(1.631,1.131) 24(1.131,1.131)
  silkscreen extent 1.02,-2.64 3.71,0.13
SBB_5089 [mil]
  rect 35x70 smd: 1(0,0) 3(118.11,0)
  rect 35x90 smd: 2(59.06,0)
  rect 129.13x59 smd: 4(59.06,215)
  silkscreen extent -53,47 163,174
SIP2-T0 [mm]
  rect 1.3x4 smd: 1(0,0) 2(2.54,0)
  silkscreen extent -1.12,-1.78 3.61,1.8
SIP3-T0 [mm]
  rect 1.3x4 smd: 1(0,0) 2(2.54,0) 3(5.08,0)
  silkscreen extent -1.12,-1.78 6.2,1.8
SIP4-T0 [mm]
  rect 1.3x4 smd: 1(0,0) 2(2.54,0) 3(5.08,0) 4(7.62,0)
  silkscreen extent -1.12,-1.8 8.76,1.8
SOP8 [mm] "Small Outline; 8 Leads; Body Width 4.3 mm; Pitch 1.27 mm"
  rect 2.6x0.6 smd: 1(-0.009,0.127) 2(-0.009,-1.143) 3(-0.009,-2.413) 4(-0.009,-3.683) 5(5.191,-3.683) 6(5.191,-2.413) 7(5.191,-1.143) 8(5.191,0.127)
  silkscreen extent 1.49,-4.57 3.69,0.89
SOT23-5 [mm]
  rect 0.55x1.45 smd: 1(-0.315,-2.091) 2(0.635,-2.091) 3(1.585,-2.091) 4(1.585,0.059) 5(-0.315,0.059)
  silkscreen extent -1.04,-3.24 2.19,-0.12
SOT-223 [mil]
  rect 39x59 smd: 1(0,0) 3(180,0)
  rect 129.13x59 smd: 2(90,248.03)
  rect 38.98x59.05 smd: 2(90,0)
  silkscreen extent -40,40 220,200
TO-263 [mil]
  rect 50x100 smd: 1(0,0) 2(100,0) 3(200,0)
  rect 425x410 smd: 2(100,330)
  silkscreen extent -130,100 330,550
TQFP100 [mm]
  oval 1.778x0.27 smd: 1(-2.54,-1.905)
  rect 1.778x0.27 smd: 2(-2.54,-2.405) 3(-2.54,-2.905) 4(-2.54,-3.405) 5(-2.54,-3.905) 6(-2.54,-4.405) 7(-2.54,-4.905) 8(-2.54,-5.405) 9(-2.54,-5.905) 10(-2.54,-6.405) 11(-2.54,-6.905) 12(-2.54,-7.405) 13(-2.54,-7.905) 14(-2.54,-8.405) 15(-2.54,-8.905) 16(-2.54,-9.405) 17(-2.54,-9.905) 18(-2.54,-10.405) 19(-2.54,-10.905) 20(-2.54,-11.405) 21(-2.54,-11.905) 22(-2.54,-12.405) 23(-2.54,-12.905) 24(-2.54,-13.405) 25(-2.54,-13.905) 51(12.96,-13.905) 52(12.96,-13.405) 53(12.96,-12.905) 54(12.96,-12.405) 55(12.96,-11.905) 56(12.96,-11.405) 57(12.96,-10.905) 58(12.96,-10.405) 59(12.96,-9.905) 60(12.96,-9.405) 61(12.96,-8.905) 62(12.96,-8.405) 63(12.96,-7.905) 64(12.96,-7.405) 65(12.96,-6.905) 66(12.96,-6.405) 67(12.96,-5.905) 68(12.96,-5.405) 69(12.96,-4.905) 70(12.96,-4.405) 71(12.96,-3.905) 72(12.96,-3.405) 73(12.96,-2.905) 74(12.96,-2.405) 75(12.96,-1.905)
  rect 0.27x1.778 smd: 26(-0.79,-15.655) 27(-0.29,-15.655) 28(0.21,-15.655) 29(0.71,-15.655) 30(1.21,-15.655) 31(1.71,-15.655) 32(2.21,-15.655) 33(2.71,-15.655) 34(3.21,-15.655) 35(3.71,-15.655) 36(4.21,-15.655) 37(4.71,-15.655) 38(5.21,-15.655) 39(5.71,-15.655) 40(6.21,-15.655) 41(6.71,-15.655) 42(7.21,-15.655) 43(7.71,-15.655) 44(8.21,-15.655) 45(8.71,-15.655) 46(9.21,-15.655) 47(9.71,-15.655) 48(10.21,-15.655) 49(10.71,-15.655) 50(11.21,-15.655) 76(11.21,-0.155) 77(10.71,-0.155) 78(10.21,-0.155) 79(9.71,-0.155) 80(9.21,-0.155) 81(8.71,-0.155) 82(8.21,-0.155) 83(7.71,-0.155) 84(7.21,-0.155) 85(6.71,-0.155) 86(6.21,-0.155) 87(5.71,-0.155) 88(5.21,-0.155) 89(4.71,-0.155) 90(4.21,-0.155) 91(3.71,-0.155) 92(3.21,-0.155) 93(2.71,-0.155) 94(2.21,-0.155) 95(1.71,-0.155) 96(1.21,-0.155) 97(0.71,-0.155) 98(0.21,-0.155) 99(-0.29,-0.155) 100(-0.79,-0.155)
  silkscreen extent -1.26,-14.37 11.67,-1.44
晶振7050 [mm]
  rect 2.5x2.5 smd: 1(0,0) 2(5,0) 3(5,4.2) 4(0,4.2)
  silkscreen extent -1.63,-1.63 6.63,5.84
晶振-1 [mm] "5.08MM"
  round 1.5 hole 0.95: 1(0,0) 2(5.08,0)
  silkscreen extent -2.79,-1.97 7.87,1.97

## Part data
C1 C4 C5 C6 C8 C9 C10 C11 C13 C14 C15 C16 C17 C18 C19 C20 C21 C22 C24 C25 C26 C28 C29 C30 C31 C32 C33 C35 C36 C38 C40 C41 C42 C43 C45 C46 C48 C51 C52 C53 C54 C55 C60 C63 C65 C69 C70 C80 C81 C86 C87 C88 C89 C90 C91 C92 C93 C94 C95 C96 C97 C100 C103 C104 C105 C106 C107 C108 C109 C110 C112 C113 C114 C115 C116 C117 C118 C119 C120 C121 C122 C123 C124 C125 C126 C127 C128 C129 C130: "Capacitor"
C2 C3 C7 C12 C23 C27 C34 C37 C39 C44 C47 C49 C50: library part CAP+
C56 C57 C58 C59 C61 C64 C66 C67 C68 C71 C72 C73 C74 C75 C76 C77 C78: library part "CAP NP_Dup3"
C82 C83 C84 C85: library part Cap, "Capacitor"
D1 D2 D5: library part LED0, "Typical INFRARED GaAs LED"
D4: "Typical INFRARED GaAs LED"
J1: "Low Voltage Power Supply Connector"
J2 J3: "RF Coaxial PCB Connector, MCX; Thru-Hole, Right-Angle Mount Socket, Blunt Post Terminal, 50 Ohm Impedance"
L1 L11 L17 L18 L19 L20 L21 L23 L24: "Magnetic-Core Inductor"
L2 L3 L4 L5 L6 L7 L8 L9 L10 L12 L13 L14 L15 L22: library part H
LL1 LL2: "Center-Tapped Transformer (Coupled Inductor Model)"
P1 P7: "Header, 2-Pin"
P2 P4: "Header, 5-Pin, Dual row"
P3: "Header, 3-Pin"
P5 PP1 PP2: "Header, 4-Pin"
P10: "Header, 30-Pin"
R1 R2 R3 R4 R5 R6 R7 R8 R9 R10 R11 R12 R13 R14 R15 R16 R17 R18 R19 R20 R21 R22 R23 R24 R25 R26 R27 R28 R29 R30 R31 R32 R33 R34 R35 R36 R37 R38 R39 R40 R41 R42 R43 R44 R45 R46 R47 R48 R49 R50 R51 R52 R53 R54 R55 R57 R58 R59 R60 R61 R62 R63 R64: library part RES
T1 T2: library part SPX29300T
T3 T4: library part 117
U4: "Cyclone II Family, 1.2V FPGA, 138 I/O Pins, 2 PLLs, 208-Pin PQFP, Speed Grade 8, Commercial Grade"
U6: "EPCS4 Series, In-system programmable 3.3V serial configuration device, 8-Pin SOIC, 4-Megabit, Industrial Grade, Pb-Free"
U7: "STM32 ARM-based 32-bit MCU with 64 Kbytes Flash, 100-pin LQFP, Industrial Temperature"
Y2: library part XTAL, "Crystal Oscillator"

## Free pads (board coordinates)
  round 3.8 / inner round 3 / far side round 3.8 hole 2.3 mask+0.051: 0(310.769,179.019) 0(310.845,210.134) 0(325.933,154.178) 0(326.441,170.967) 0(335.991,180.746) 0(342.24,242.316) 0(361.594,153.645) 0(370.713,181.635) 0(375.564,242.468) 0(378.13,200.355) 0(391.109,153.67) 0(405.409,242.316) 0(421.005,199.822) 0(421.437,154.33) 0(434.721,242.392) 0(457.784,190.373) 0(457.784,216.637)
  round 4.8 hole 3.2 mask+0.051: 0(311.669,154.367) 0(311.796,241.59) 0(456.881,241.489) 0(456.931,154.57)

## Via types
v1: diameter 0.5, hole 0.3, Top Layer to Bottom Layer, 224 vias
v2: diameter 1, hole 0.5, Top Layer to Bottom Layer, 206 vias
v3: diameter 0.508, hole 0.254, Top Layer to Bottom Layer, 97 vias
v4: diameter 0.5, hole 0.3, Top Layer to Bottom Layer, tented both sides, 7 vias
v5: diameter 2, hole 1, Top Layer to Bottom Layer, 4 vias

## Nets (pads, with @x,y where several pads share a name; then routed paths per layer and width w, separated by ;. In a path a pad name is that pad's centre, name@x,y a point inside that pad or via, vN(x,y) a via of type N, cw(c..) or ccw(c..) an arc to the next point about the centre after c; other vN are vias at no path point)
5VCC: C23.1 C27.2 D2.1 L11.1 L24.2 R1.1 R3.1 R5.1 R7.1 T1.3 T2.1 | length 219.6
  Top Layer w0.5: 365.785,161.112 371.907,161.112 D2.1@373.685,159.334 ; R5.1@400.012,207.366 400.012,205.016 v1(400.075,204.953)
  Top Layer w1: T1.3@356.133,163.271 356.133,159.563 C23.1@356.514,159.182 ; C27.2@365.531,159.182 365.785,159.436 365.785,161.112 T2.1@365.785,163.271 ; R1.1@400.075,214.109 v2(400.075,216.103) ; v2(400.075,222.783) R3.1@400.075,224.473 ; R7.1@400.075,231.585 v2(400.075,233.604) ; L11.1@447.294,215.671 v5(447.294,217.957)
  Top Layer w2: T1.3@356.133,163.271 T2.1@365.785,163.271
  VCC w2: v2(361.975,161.265) 408.508,161.265 428.168,180.924 428.168,204.546 v5(431.825,208.204) 441.579,217.957 v5(447.294,217.957) ; v2(400.075,233.604) v2(400.075,222.783) v2(400.075,216.103) 400.075,203.886 427.507,203.886
  Bottom Layer w1: v5(431.825,208.204) L24.2@431.825,210.896
  other v2: 359.74,161.239 359.74,163.398 361.975,163.424
5VCC_AMP: C53.2 C54.2 C55.2 L11.2 L22.1 | length 8.6
  Top Layer w1: L22.1@449.593,207.023 C55.2@449.593,209.118 C54.2@449.593,211.328 C53.2@449.593,213.538 L11.2@449.593,215.633
A0: PP1.4 U7.23 | length 23.7
  Top Layer w0.203: PP1.4@391.744,159.461 v1(391.744,164.287) ; v1(394.691,177.597) 396.314,179.221 U7.23@398.374,179.221
  VCC w0.203: v1(391.744,164.287) 394.691,167.234 v1(394.691,177.597)
A1: PP1.3 U7.24 | length 21.7
  Top Layer w0.203: PP1.3@394.284,159.461 v1(394.284,164.795) ; v1(395.427,177.038) 397.11,178.721 U7.24@398.374,178.721
  VCC w0.203: v1@394.259,164.77 v1(394.284,164.795) 395.427,165.938 v1(395.427,177.038)
A2: PP1.2 U7.25 | length 19.8
  Top Layer w0.203: v1(396.291,176.138) U7.25@398.374,178.221 ; PP1.2@396.824,159.461 v1(396.824,162.706)
  VCC w0.203: v1(396.291,176.138) 396.291,163.297 v1@396.824,162.763
A3: PP1.1 U7.26 | length 20.7
  Top Layer w0.203: v1(396.951,175.59) 397.832,176.471 U7.26@400.124,176.471 ; PP1.1@399.364,159.461 399.415,159.512 v1(399.415,164.897)
  VCC w0.203: v1(396.951,175.59) 399.415,173.126 v1(399.415,164.897)
A4: PP2.4 U7.29 | length 17.6
  Top Layer w0.203: U7.29@401.624,176.471 401.624,165.711 403.149,164.186 PP2.4@403.149,159.487
A5: U7.30
A6: U7.31
A7: U7.32
A8: U7.67
A9: U7.68
A10: U7.69
A11: U7.70
A12: U7.71
A13: P5.3 R58.2 U7.72 | length 49.8
  Top Layer w0.203: U7.72@413.874,188.721 v1(415.495,188.721)
  Bottom Layer w0.203: v1(415.495,188.721) 413.461,186.687 413.461,181.102 425.958,168.605 432.689,168.605 435.483,165.811 R58.2@435.483,164.313 ; P5.3@435.153,154.102 R58.2@435.153,163.982
A14: P5.2 R57.1 U7.76 | length 49
  Top Layer w0.203: v1(412.124,189.975) U7.76@412.124,191.971
  Bottom Layer w0.203: v1(412.124,189.975) 412.124,181.754 425.806,168.072 430.505,168.072 432.562,166.014 R57.1@432.562,164.313 ; P5.2@432.613,154.102 R57.1@432.613,164.262
A15: U7.77
ASDI: P4.9 U4.1 U6.5 | length 35.5
  Top Layer w0.254: P4.9@318.541,198.806 v4(328.905,198.806) 330.429,198.806 332.461,200.839 U4.1@332.461,203.261 ; U6.5@332.368,192.075 336.067,192.075 337.058,193.065 337.058,197.561 v4(336.448,198.171) v4@336.448,198.196
  Bottom Layer w0.254: v4(328.905,198.806) 335.826,198.806 v4@336.448,198.183 ; v4(336.448,198.171) v4@336.448,198.196
AVDD3_3_4360: C24.2 C25.2 L19.2 U1.2 | length 9
  Top Layer w0.203: U1.2@437.413,188.079 438.564,188.079 v1(439.014,187.63)
  Bottom Layer w0.5: v1(439.014,187.63) 439.471,187.173 C24.2@439.471,184.734
  Bottom Layer w1.2: L19.2@437.413,184.734 C25.2@441.503,184.734
B0: PP2.3 U7.35 | length 17.4
  Top Layer w0.203: U7.35@404.624,176.471 404.624,164.54 405.689,163.474 PP2.3@405.689,159.487
B1: PP2.2 U7.36 | length 18.3
  Top Layer w0.203: U7.36@405.124,176.471 405.124,168.053 408.229,164.948 PP2.2@408.229,159.487
B2: PP2.1 U7.37 | length 19.1
  Top Layer w0.203: U7.37@405.624,176.471 405.624,168.306 410.769,163.16 PP2.1@410.769,159.487
B3: P10.1 U7.89 | length 27.8
  Top Layer w0.203: v1(401.625,179.705) 405.624,183.704 U7.89@405.624,191.971
  Bottom Layer w0.203: P10.1@398.12,167.31 398.12,176.2 v1(401.625,179.705)
B4: P10.2 U7.90 | length 27.8
  Top Layer w0.203: v1(401.625,180.67) 405.124,184.169 U7.90@405.124,191.971
  Bottom Layer w0.203: P10.2@398.62,167.31 398.62,175.176 402.209,178.765 402.209,180.086 v1(401.625,180.67)
B5: P10.3 U7.91 | length 27.8
  Top Layer w0.203: v1(401.625,181.635) 404.624,184.634 U7.91@404.624,191.971
  Bottom Layer w0.203: P10.3@399.12,167.31 399.12,175.015 402.692,178.587 402.692,180.569 v1(401.625,181.635)
B6: P10.4 U7.92 | length 27.8
  Top Layer w0.203: v1(401.625,182.601) 404.124,185.099 U7.92@404.124,191.971
  Bottom Layer w0.203: P10.4@399.62,167.31 399.62,174.855 403.174,178.41 403.174,181.051 v1(401.625,182.601)
B7: P10.5 U7.93 | length 27.9
  Top Layer w0.203: v1(401.625,183.566) 403.624,185.565 U7.93@403.624,191.971
  Bottom Layer w0.203: P10.5@400.12,167.31 400.12,174.644 403.733,178.257 403.733,181.458 v1(401.625,183.566)
B8: P10.6 U7.95 | length 27.7
  Top Layer w0.203: v1(401.625,184.531) 402.624,185.53 U7.95@402.624,191.971
  Bottom Layer w0.203: P10.6@400.62,167.31 400.62,174.407 404.317,178.105 404.317,181.839 v1(401.625,184.531)
B9: P10.7 U7.96 | length 27.8
  Top Layer w0.203: v1(401.625,185.496) 402.124,185.995 U7.96@402.124,191.971
  Bottom Layer w0.203: P10.7@401.12,167.31 401.12,174.171 404.901,177.952 404.901,182.22 v1(401.625,185.496)
B10: P7.2 U7.47 | length 27.1
  Top Layer w0.203: U7.47@410.624,176.471 410.624,171.976 417.601,164.998 v1(417.601,163.5)
  Bottom Layer w0.203: P7.2@413.36,153.975 413.36,159.258 v1(417.601,163.5)
B11: P7.1 U7.48 | length 26.5
  Top Layer w0.203: U7.48@411.124,176.471 411.124,172.213 v1(418.351,164.986)
  Bottom Layer w0.203: P7.1@415.9,153.975 415.874,154 415.874,159.664 418.351,162.141 v1(418.351,164.986)
B12: U7.51
B13: U7.52
B14: U7.53
B15: U7.54
BAT: U7.6
C0: U7.15
C1: U7.16
C2: U7.17
C3: U7.18
C4: U7.33
C5: U7.34
C6: R15.2 U7.63 | length 6.3
  Top Layer w0.203: U7.63@413.874,184.221 415.27,184.221 v1(416.992,182.499)
  Bottom Layer w0.203: v1(416.992,182.499) 417.855,181.635 R15.2@419.151,181.635
C7: R14.2 U7.64 | length 5.1
  Top Layer w0.203: U7.64@413.874,184.721 416.193,184.721 v1(416.865,184.048)
  Bottom Layer w0.203: v1(416.865,184.048) R14.2@418.736,184.048
C8: R13.2 U7.65 | length 4.9
  Top Layer w0.203: U7.65@413.874,185.221 v1(416.429,185.221)
  Bottom Layer w0.203: v1(416.429,185.221) R13.2@418.74,185.221
C9: R12.2 U7.66 | length 6.1
  Top Layer w0.203: U7.66@413.874,185.721 415.616,185.721 v1(416.255,186.36)
  Bottom Layer w0.203: v1(416.255,186.36) 417.525,187.63 R12.2@419.151,187.63
C10: R53.1 U7.78 | length 4.5
  Top Layer w0.203: U7.78@411.124,191.971 411.124,193.649 v1(411.48,194.005)
  Bottom Layer w0.203: v1(411.48,194.005) 411.963,194.488 R53.1@411.963,196.113
C11: R52.1 U7.79 | length 4.4
  Top Layer w0.203: v1(409.829,194.462) 410.624,193.668 U7.79@410.624,191.971
  Bottom Layer w0.203: v1(409.829,194.462) R52.1@409.829,196.08
C12: R47.2 U7.80 | length 5.1
  Top Layer w0.203: v1(408.838,194.412) 410.124,193.126 U7.80@410.124,191.971
  Bottom Layer w0.203: R47.2@407.763,196.108 408.838,195.033 v1(408.838,194.412)
C13: D5.1 U7.7 | length 9.5
  Top Layer w0.203: D5.1@393.268,193.37 393.268,190.144 396.192,187.221 U7.7@398.374,187.221
C14: U7.8
C15: U7.9
CLK2: LL2.4 R42.1 U5.62 | length 13.1
  Top Layer w0.203: v1(372.745,219.71) 373.863,219.71 374.114,219.962 U5.62@375.431,219.962
  Bottom Layer w0.203: R42.1@367.548,221.732 LL2.4@367.548,225.554 ; R42.1@367.665,221.615 367.665,220.574 368.529,219.71 v1(372.745,219.71)
CLK2*: LL2.5 R42.2 U5.63 | length 15.2
  Top Layer w0.203: v1(371.475,218.999) 373.71,218.999 374.173,219.462 U5.63@375.431,219.462
  Bottom Layer w0.203: LL2.5@365.648,225.554 365.648,221.757 R42.2@365.506,221.615 368.122,218.999 v1(371.475,218.999)
CONF_DONE: P4.3 R38.1 U4.123 | length 88.7
  Top Layer w0.203: v1(316.738,205.715) 316.738,228.219 326.415,237.896 348.386,237.896 348.961,237.321 U4.123@348.961,233.985 ; P4.3@318.541,191.186 317.322,189.967 317.322,187.096 318.211,186.207 R38.1@323.52,186.207
  VCC w0.203: v1(316.738,205.715) 317.271,205.181 317.271,192.456 P4.3@318.541,191.186
D0: P10.15 U7.81 | length 26.8
  Top Layer w0.203: v1(409.624,185.697) U7.81@409.624,191.971
  Bottom Layer w0.203: P10.15@405.12,167.31 405.12,171.922 409.931,176.733 409.931,183.667 409.624,183.974 v1(409.624,185.697)
D1: P10.16 U7.82 | length 27.2
  Top Layer w0.203: v1(409.124,187.534) U7.82@409.124,191.971
  Bottom Layer w0.203: v1(409.124,187.534) 410.439,186.219 410.439,183.953
  Bottom Layer w0.254: P10.16@405.62,167.31 405.62,171.406 410.439,176.225 410.439,183.953
D2: R46.2 U7.83 | length 6.2
  Top Layer w0.203: v1(406.375,194.158) 407.772,194.158 408.624,193.306 U7.83@408.624,191.971
  Bottom Layer w0.203: R46.2@405.663,196.108 405.663,194.869 v1(406.375,194.158)
D3: U7.84
D4: P10.12 U7.85 | length 26.6
  Top Layer w0.203: v1(407.624,183.434) U7.85@407.624,191.971
  Bottom Layer w0.203: P10.12@403.62,167.31 403.62,172.886 407.924,177.19 407.924,183.134 v1(407.624,183.434)
D5: P10.11 U7.86 | length 26.4
  Top Layer w0.203: v1(407.124,182.664) U7.86@407.124,191.971
  Bottom Layer w0.203: P10.11@403.12,167.31 403.12,173.148 407.264,177.292 407.264,182.524 v1(407.124,182.664)
D6: U7.87
D7: P10.9 U7.88 | length 26.3
  Top Layer w0.203: v1(406.124,183.055) U7.88@406.124,191.971
  Bottom Layer w0.203: P10.9@402.12,167.31 402.12,173.647 406.124,177.651 v1(406.124,183.055)
D8: P10.26 U7.55 | length 15.2
  Top Layer w0.203: v1(411.124,179.045) 412.3,180.221 U7.55@413.874,180.221
  Bottom Layer w0.203: P10.26@410.62,167.309 410.62,173.663 411.124,174.168 v1(411.124,179.045)
D9: P10.27 U7.56 | length 16.1
  Top Layer w0.203: v1(411.328,180.238) 411.81,180.721 U7.56@413.874,180.721
  Bottom Layer w0.203: P10.27@411.12,167.31 411.12,173.426 411.709,174.015 411.709,179.857 v1(411.328,180.238)
D10: P10.28 U7.57 | length 17.1
  Top Layer w0.203: v1(411.319,181.221) U7.57@413.874,181.221
  Bottom Layer w0.203: v1(411.319,181.221) 412.242,180.298 412.242,173.812 411.62,173.19 P10.28@411.62,167.31
D11: P10.10 U7.58 | length 23.3
  Top Layer w0.203: v1@406.705,181.721 U7.58@413.874,181.721
  Bottom Layer w0.203: P10.10@402.62,167.31 402.62,173.41 406.705,177.495 v1(406.705,181.712)
D12: U7.59
D13: U7.60
D14: P10.13 U7.61 | length 22.8
  Top Layer w0.203: v1(408.483,182.651) 409.052,183.221 U7.61@413.874,183.221
  Bottom Layer w0.203: P10.13@404.12,167.31 404.12,172.649 408.483,177.013 v1(408.483,182.651)
D15: P10.14 U7.62 | length 23.6
  Top Layer w0.203: v1(408.836,183.721) U7.62@413.874,183.721
  Bottom Layer w0.203: P10.14@404.62,167.31 404.62,172.438 409.346,177.165 409.346,183.21 v1(408.836,183.721)
DA0: RN1.1 U4.82 | length 5.3
  Top Layer w0.254: U4.82@360.619,220.419 RN1.1@365.893,220.419
DA1: RN1.2 U4.84 | length 5.2
  Top Layer w0.254: U4.84@360.619,221.419 RN1.2@365.833,221.419
DA2: RN1.3 U4.86 | length 5.5
  Top Layer w0.254: U4.86@360.619,222.419 363.483,222.419 363.813,222.088 RN1.3@365.963,222.088
DA3: RN1.4 U4.87 | length 5.3
  Top Layer w0.254: U4.87@360.619,222.919 RN1.4@365.933,222.919
DA4: RN2.1 U4.88 | length 5.6
  Top Layer w0.254: U4.88@360.619,223.419 364.643,223.419 365.238,224.014 RN2.1@365.963,224.014
DA5: RN2.2 U4.90 | length 5.5
  Top Layer w0.254: U4.90@360.619,224.419 364.652,224.419 365.047,224.814 RN2.2@365.963,224.814
DA6: RN2.3 U4.92 | length 5.4
  Top Layer w0.254: U4.92@360.619,225.419 364.814,225.419 365.009,225.614 RN2.3@365.963,225.614
DA7: RN2.4 U4.94 | length 5.3
  Top Layer w0.254: U4.94@360.619,226.419 RN2.4@365.958,226.419
DA8: RN3.1 U4.95 | length 5.6
  Top Layer w0.254: U4.95@360.619,226.919 364.714,226.919 365.334,227.539 RN3.1@365.963,227.539
DA9: RN3.2 U4.96 | length 5.7
  Top Layer w0.254: U4.96@360.619,227.419 364.248,227.419 365.168,228.339 RN3.2@365.963,228.339
DA10: RN3.3 U4.97 | length 5.8
  Top Layer w0.254: U4.97@360.619,227.919 363.859,227.919 365.079,229.139 RN3.3@365.963,229.139
DA11: RN3.4 U4.99 | length 5.8
  Top Layer w0.254: U4.99@360.619,228.919 363.869,228.919 364.889,229.939 RN3.4@365.963,229.939
DA12: RN4.1 U4.101 | length 5.8
  Top Layer w0.254: U4.101@360.619,229.919 363.904,229.919 365.049,231.064 RN4.1@365.963,231.064
DA13: RN4.2 U4.102 | length 5.9
  Top Layer w0.254: U4.102@360.619,230.419 363.591,230.419 365.036,231.864 RN4.2@365.963,231.864
DA14: RN4.3 U4.103 | length 6.1
  Top Layer w0.254: U4.103@360.619,230.919 363.176,230.919 364.922,232.664 RN4.3@365.963,232.664
DA15: RN4.4 U4.104 | length 6.2
  Top Layer w0.254: U4.104@360.619,231.419 362.813,231.419 364.858,233.464 RN4.4@365.963,233.464
DATA: P4.7 R36.1 U4.20 U6.2 | length 46.2
  Top Layer w0.254: P4.7@318.541,196.266 321.234,196.266 322.885,194.615 U6.2@327.168,194.615 ; v3@321.691,200.914 R36.1@323.85,200.914 ; v4(341.961,198.932) U4.20@341.961,203.261
  Bottom Layer w0.254: v3(321.666,200.889) 321.666,199.39 P4.7@318.541,196.266 339.296,196.266 v4(341.961,198.932)
DB0: RN5.8 U4.80 | length 5.4
  Top Layer w0.254: U4.80@360.619,219.419 365.755,219.419 RN5.8@365.963,219.211
DB1: RN5.7 U4.77 | length 5.5
  Top Layer w0.254: U4.77@360.619,217.919 363.613,217.919 364.105,218.411 RN5.7@365.963,218.411
DB2: RN5.6 U4.76 | length 5.4
  Top Layer w0.254: U4.76@360.619,217.419 364.002,217.419 364.194,217.611 RN5.6@365.963,217.611
DB3: RN5.5 U4.75 | length 5.2
  Top Layer w0.254: U4.75@360.619,216.919 RN5.5@365.855,216.919
DB4: RN6.8 U4.74 | length 5.6
  Top Layer w0.254: U4.74@360.619,216.419 364.276,216.419 365.009,215.686 RN6.8@365.963,215.686
DB5: RN6.7 U4.72 | length 5.6
  Top Layer w0.254: U4.72@360.619,215.419 364.463,215.419 364.996,214.886 RN6.7@365.963,214.886
DB6: RN6.6 U4.70 | length 5.5
  Top Layer w0.254: U4.70@360.619,214.419 364.651,214.419 364.984,214.086 RN6.6@365.963,214.086
DB7: RN6.5 U4.69 | length 5.6
  Top Layer w0.254: U4.69@360.619,213.919 364.312,213.919 364.945,213.286 RN6.5@365.963,213.286
DB8: RN7.8 U4.68 | length 5.9
  Top Layer w0.254: U4.68@360.619,213.419 363.873,213.419 365.131,212.161 RN7.8@365.963,212.161
DB9: RN7.7 U4.64 | length 5.3
  Top Layer w0.254: U4.64@360.619,211.419 RN7.7@365.905,211.419
DB10: RN7.6 U4.63 | length 5.5
  Top Layer w0.254: U4.63@360.619,210.919 364.442,210.919 364.8,210.561 RN7.6@365.963,210.561
DB11: RN7.5 U4.61 | length 5.4
  Top Layer w0.254: U4.61@360.619,209.919 364.477,209.919 364.635,209.761 RN7.5@365.963,209.761
DB12: RN8.8 U4.60 | length 5.7
  Top Layer w0.254: U4.60@360.619,209.419 364.367,209.419 365.151,208.635 RN8.8@365.963,208.635
DB13: RN8.7 U4.59 | length 5.8
  Top Layer w0.254: U4.59@360.619,208.919 364.105,208.919 365.189,207.835 RN8.7@365.963,207.835
DB14: RN8.6 U4.58 | length 5.9
  Top Layer w0.254: U4.58@360.619,208.419 363.869,208.419 365.252,207.035 RN8.6@365.963,207.035
DB15: RN8.5 U4.57 | length 6
  Top Layer w0.254: U4.57@360.619,207.919 363.581,207.919 365.265,206.235 RN8.5@365.963,206.235
DCLK: P4.1 R37.1 U4.21 U6.6 | length 35.3
  Top Layer w0.254: P4.1@318.541,188.646 326.339,188.646 331.038,193.345 U6.6@332.368,193.345 v4@335.585,193.345 ; R37.1@325.907,186.233 325.907,188.62 ; v4(342.461,198.178) U4.21@342.461,203.261
  Bottom Layer w0.254: v4(335.61,193.319) 337.603,193.319 v4(342.461,198.178)
DVDD3_3_4360: C17.1 C18.1 L17.2 R9.2 U1.21 | length 13.1
  Top Layer w0.203: U1.21@434.782,186.448 v1(434.782,185.13) R9.2@439.039,180.873
  Bottom Layer w0.5: L17.2@434.782,183.576 v1(434.782,185.13)
  Bottom Layer w0.8: C17.1@430.617,183.576 L17.2@434.782,183.576
E0: P10.8 U7.97 | length 27.9
  Top Layer w0.203: v1(401.624,186.461) U7.97@401.624,191.971
  Bottom Layer w0.203: P10.8@401.62,167.31 401.62,173.934 405.486,177.8 405.486,182.599 v1(401.624,186.461)
E1: R63.1 U7.98 | length 22.7
  Top Layer w0.254: R63.1@387.782,204.597 388.772,205.588 v1(388.899,205.588) ; U7.98@401.124,191.971 v1@401.124,194.329
  Bottom Layer w0.254: v1(388.899,205.588) 388.899,202.184 396.697,194.386 v1(401.066,194.386)
E2: U7.1
E3: U7.2
E4: U7.3
E5: U7.4
E6: U7.5
E7: P10.17 U7.38 | length 9.2
  Top Layer w0.203: v1(406.124,168.986) U7.38@406.124,176.471
  Bottom Layer w0.203: P10.17@406.12,167.31 v1@406.12,168.982
E8: P10.18 U7.39 | length 9.2
  Top Layer w0.203: v1(406.624,169.672) U7.39@406.624,176.471
  Bottom Layer w0.203: P10.18@406.62,167.31 v1@406.62,169.668
E9: P10.19 U7.40 | length 9.2
  Top Layer w0.254: v1(407.124,170.383) U7.40@407.124,176.471
  Bottom Layer w0.254: P10.19@407.12,167.31 v1@407.12,170.379
E10: P10.20 U7.41 | length 9.2
  Top Layer w0.254: v1(407.624,171.044) U7.41@407.624,176.471
  Bottom Layer w0.254: P10.20@407.62,167.31 v1@407.62,171.04
E11: P10.21 U7.42 | length 9.2
  Top Layer w0.254: v1(408.124,171.755) U7.42@408.124,176.471
  Bottom Layer w0.254: P10.21@408.12,167.31 v1@408.12,171.751
E12: P10.22 U7.43 | length 9.2
  Top Layer w0.254: v1(408.624,172.415) U7.43@408.624,176.471
  Bottom Layer w0.254: P10.22@408.62,167.31 v1@408.62,172.411
E13: P10.23 U7.44 | length 9.2
  Top Layer w0.254: v1(409.124,173.05) U7.44@409.124,176.471
  Bottom Layer w0.254: P10.23@409.12,167.31 v1@409.12,173.046
E14: P10.24 U7.45 | length 9.2
  Top Layer w0.254: v1(409.624,173.736) U7.45@409.624,176.471
  Bottom Layer w0.254: P10.24@409.62,167.31 v1@409.62,173.732
E15: P10.25 U7.46 | length 9.2
  Top Layer w0.254: v1(410.124,174.447) U7.46@410.124,176.471
  Bottom Layer w0.254: P10.25@410.12,167.309 v1@410.12,174.443
FD0: U4.105
FD1: U4.106
FD2: U4.108
FD3: U4.110
FD4: U4.112
FD5: U4.113
FD6: U4.114
FD7: U4.115
FPGA_CLK: C26.1 U4.28 | length 7.2
  Top Layer w0.254: U4.28@345.961,203.261 345.961,199.707 C26.1@348.513,197.155